# Altium PCB AICatRope V1.2双面板 1.0mm.PcbDoc
Units mil, origin at the board's own origin, x right, y up, seen from the top; angles counter-clockwise.
Board outline 6000 x 4000 mil, 2 copper layers (Top Layer, Bottom Layer); 59 components, 38 nets, 170 pads, 87 vias.
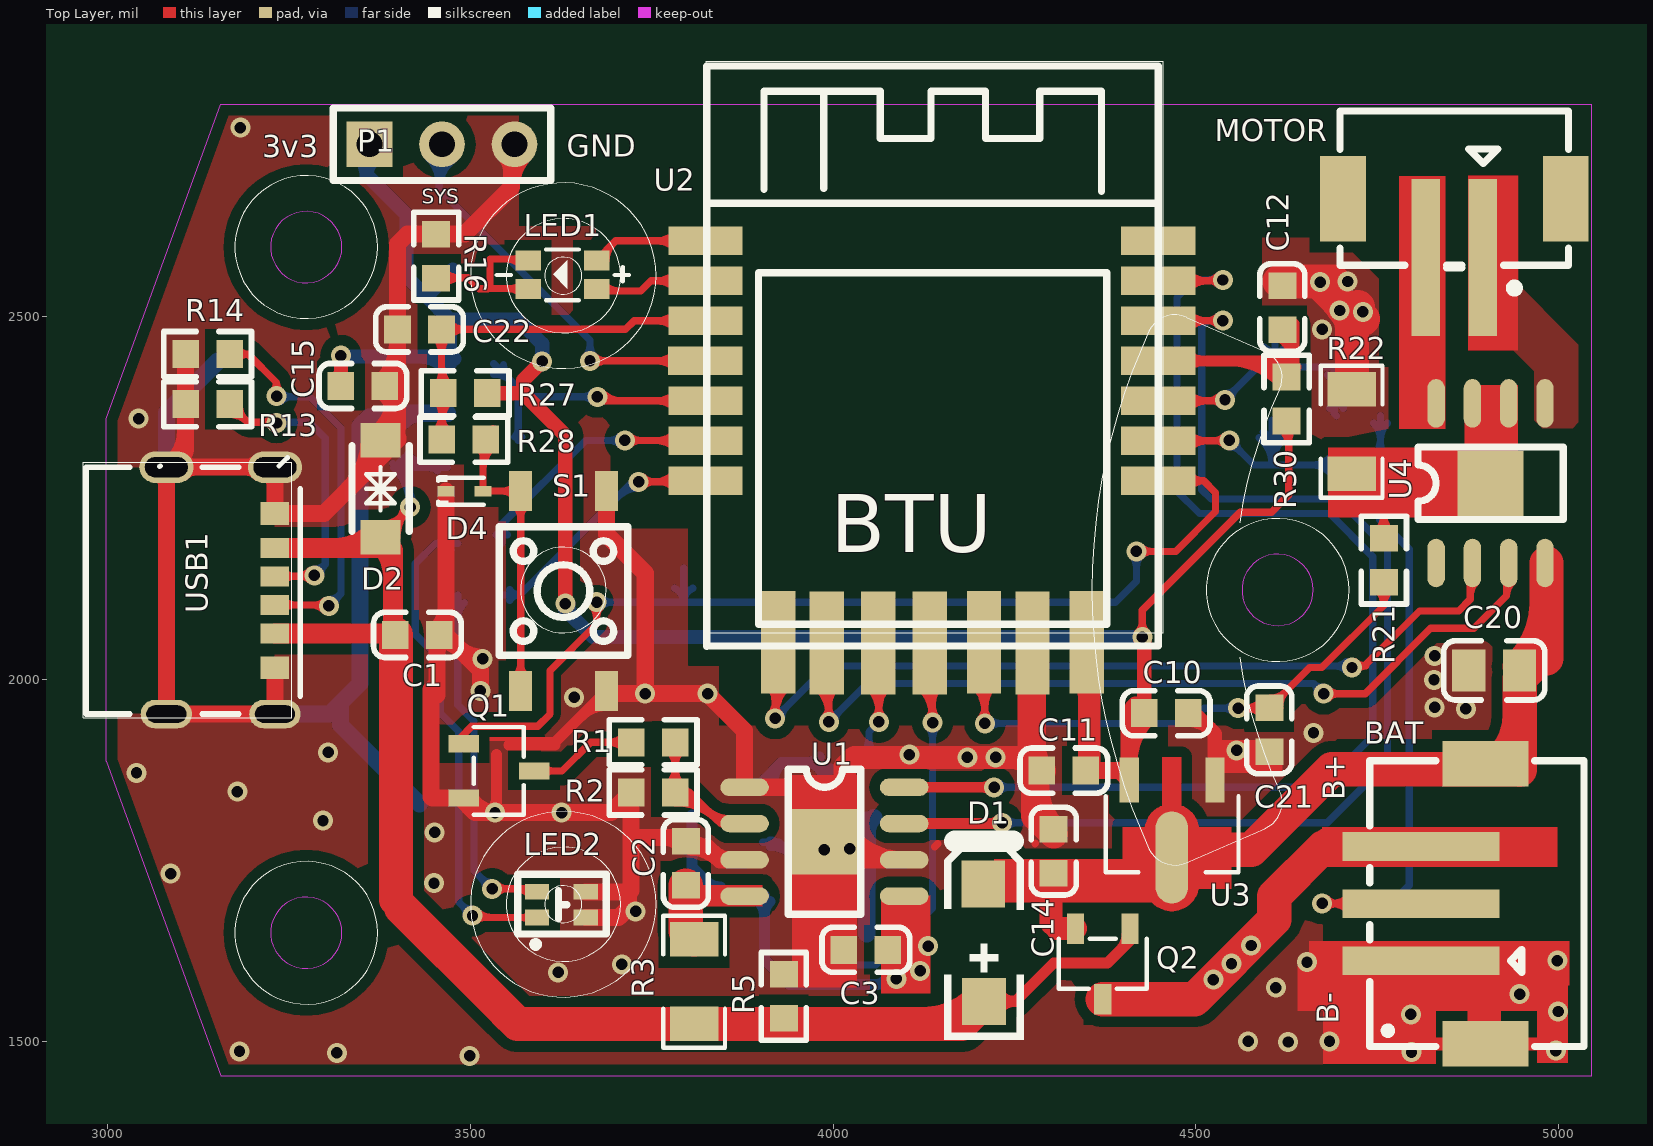
[diagram p0: Top Layer view]
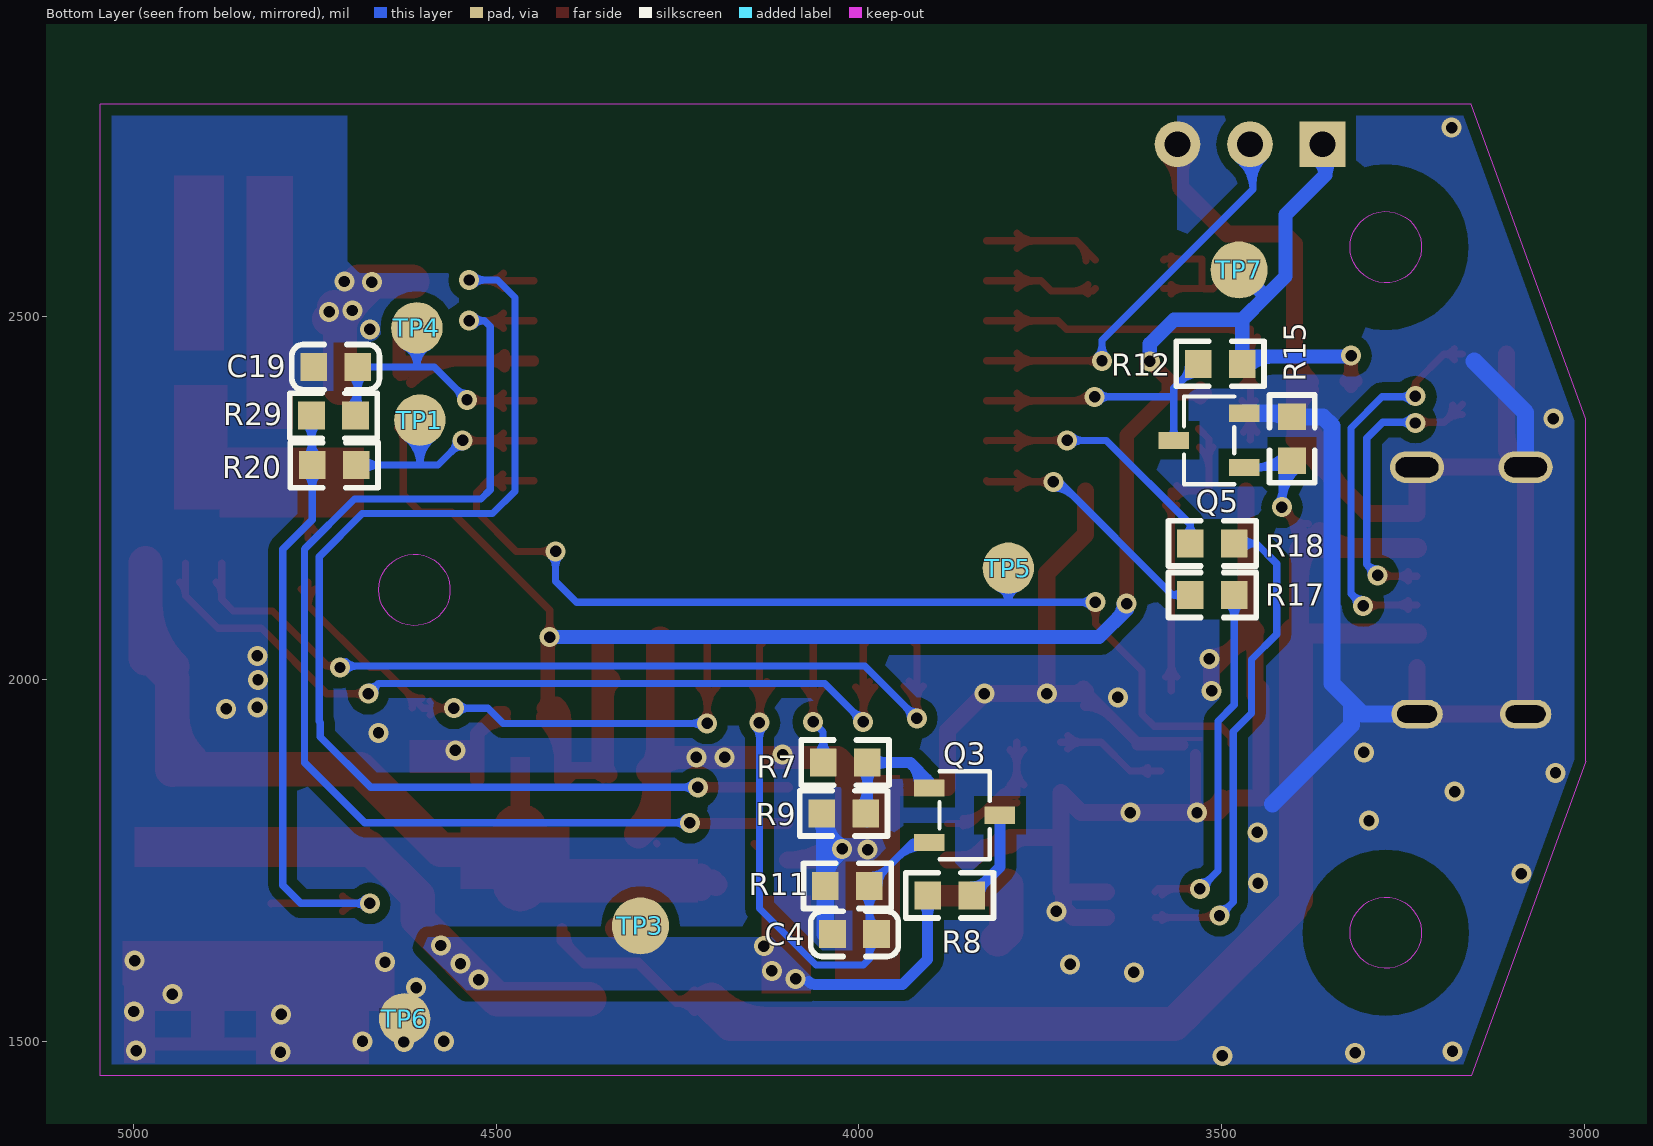
[diagram p1: Bottom Layer view, seen from below]
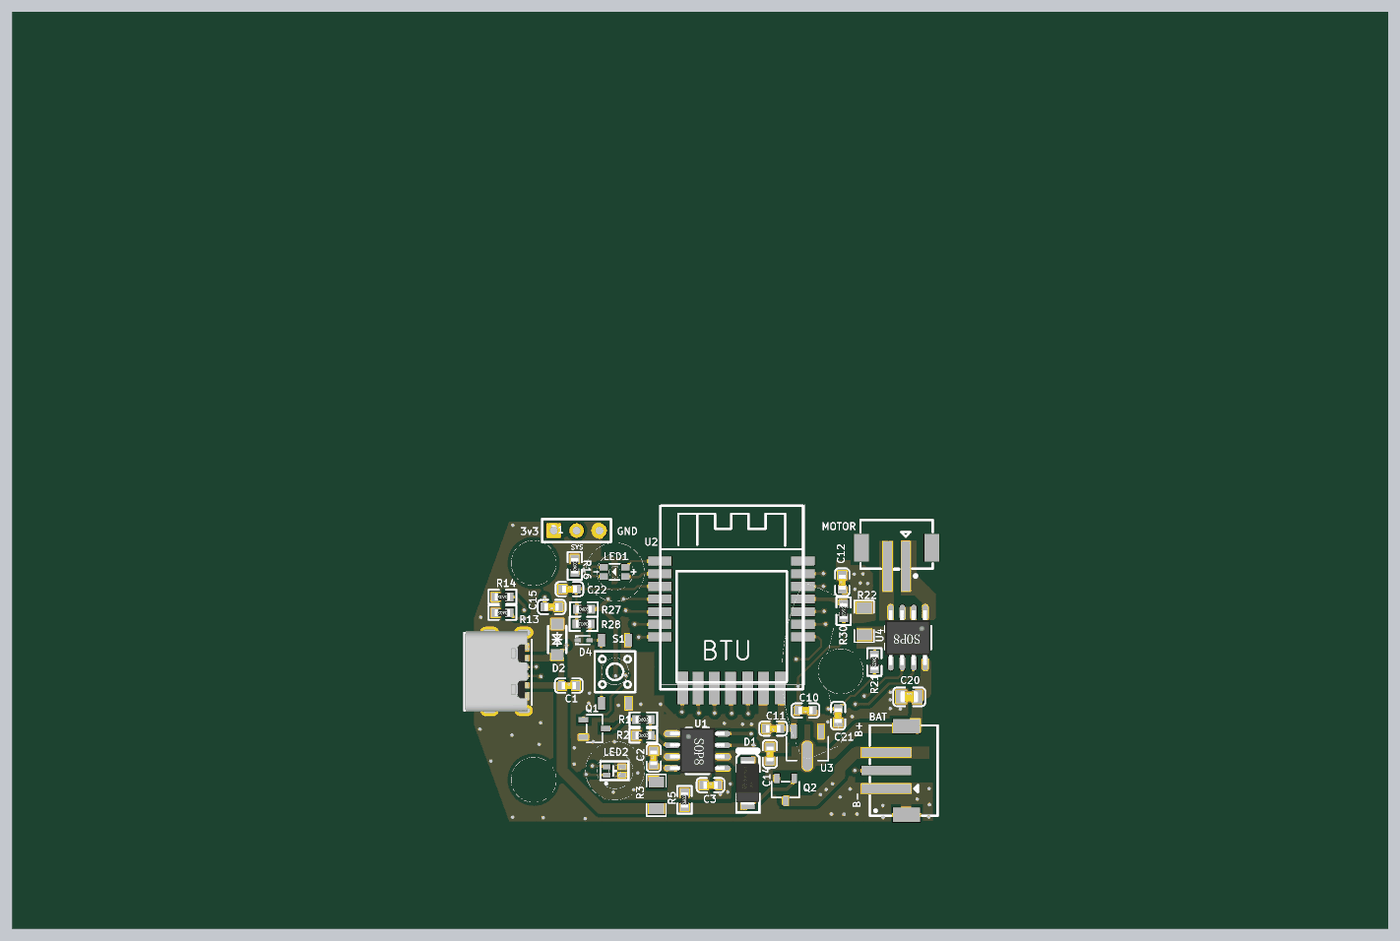
[diagram p2: 3D render of the assembled board from above, using the file's embedded part models]
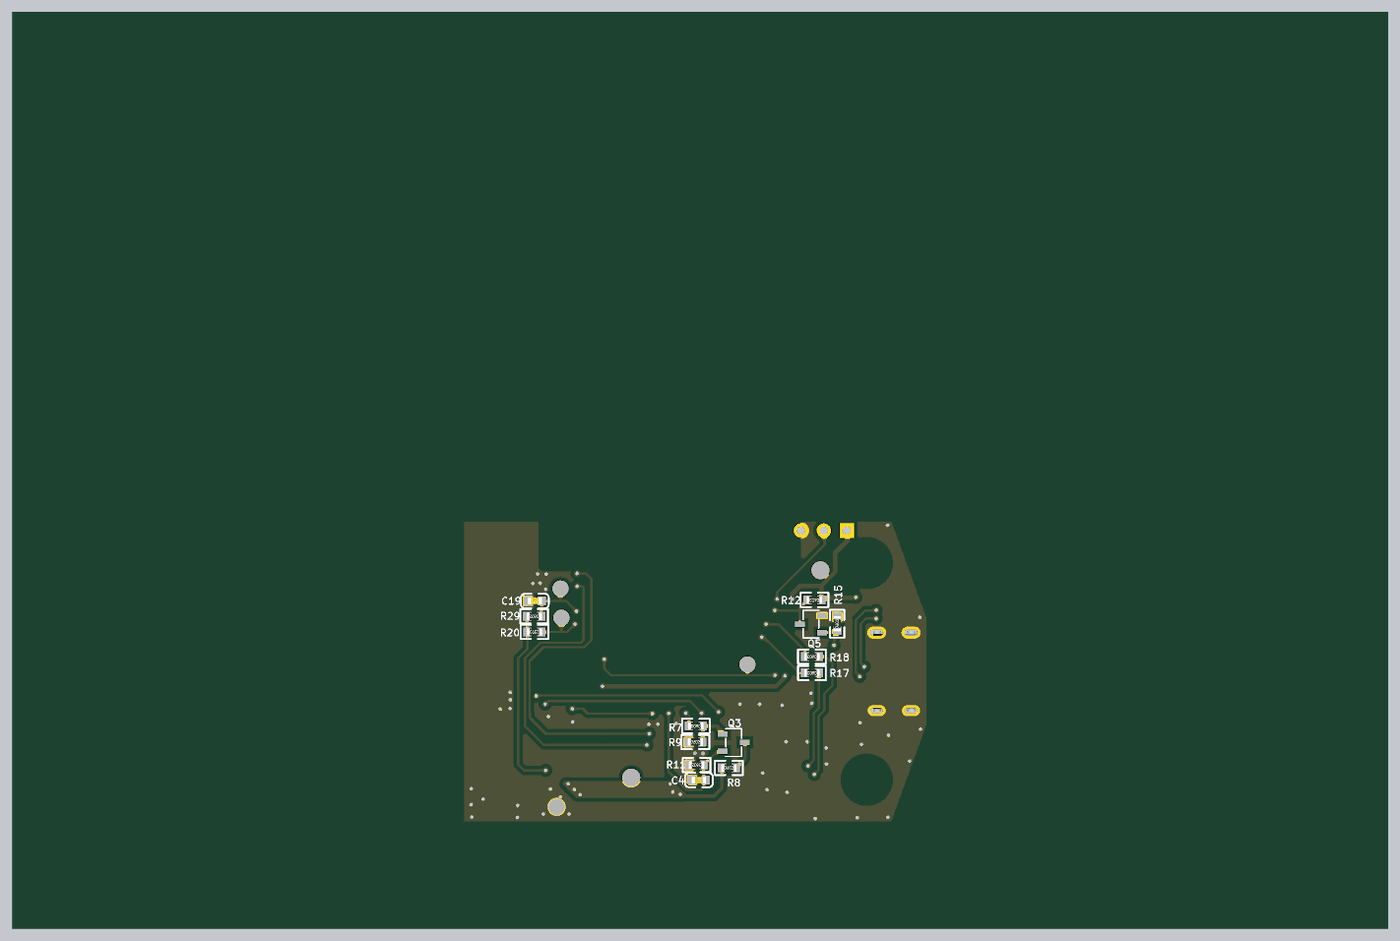
[diagram p3: 3D render of the assembled board from below, using the file's embedded part models]

## Layer stack, top to bottom
Top Layer: signal copper 1.4
Dielectric: dielectric 12.6, FR-4, Dk 4.8
Bottom Layer: signal copper 1.4

## Board outline
1000,1000 7000,1000 7000,5000 1000,5000

## Design rules (kind name [scope] priority, off if disabled: settings)
Clearance [All] p1: gap=7
ComponentClearance [All] p1: gap=0 collisioncheckmode=3 verticalgap=0 showdistances=FALSE
MinimumSolderMaskSliver [All] p1: minsoldermaskwidth=0
PolygonConnect [All] p1: connectstyle=Direct reliefconductorwidth=10 reliefentries=4 polygonreliefangle="90 Angle"
RoutingVias [All] p1: holewidth=28 width=50 viastyle="Through Hole" minholewidth=28 minwidth=50 maxholewidth=28 maxwidth=50
SilkToSilkClearance [All] p1: silktosilkclearance=0
SilkscreenOverComponentPads [All] p1: minsilkscreentomaskgap=0
SolderMaskExpansion [All] p1: expansion=4
TestPointUsage [All] p1: valid=0 allowmultiple=FALSE
Testpoint [All] p1: side=15 testpointundercomponent=TRUE minsize=40 maxsize=100 preferedsize=60 minholesize=0 maxholesize=40 preferedholesize=32 testpointgrid=1 style=1023 order=0-112345678
Width [All] p1: maxlimit=200 minlimit=10 preferedwidth=10 minimp=50.000000 maximp=50.000000 favimp=50.000000
20 further rules are at their usual default settings.

## Classes and differential pairs
component class cat: BAT C1 C2 C3 C4 C10 C11 C12 C14 C15 C19 C20 C21 C22 D1 D2 D4 LED1 LED2 MOTOR P1 Q1 Q2 Q3 Q5 R1 R2 R3 R5 R7 R8 R9 R11 R12 R13 R14 R15 R16 R17 R18 R20 R21 R22 R27 R28 R29 R30 S1 TP1 TP2 U1 U2 U3 U4 USB1

## Components (designator, comment, footprint, x,y, rotation, side; value= is the part's Value field where it differs from the comment)
BAT "BX-PH2.0-3PWT" CONN-SMD_2.0-3PLT 4860,1728 r270 top (schematic designator BAT1)
C1 "100nF" 0603_C 3427,2061 r0 top
C2 "4.7UF" 0603_c 3797,1746 r270 top
C3 "10UF" 0603_c 4045,1627 r0 top
C4 "100nF" 0603_C 4006,1649 r180 bottom
C10 "10uf/25V" 0603_c 4459,1953 r180 top
C11 "100nF" 0603_C 4318,1874 r180 top
C12 "100nF" 0603_c 4619,2512 r270 top
C14 "10uf/25V" 0603_c 4304,1763 r270 top
C15 "10uf" 0603_c 3352,2404 r180 top
C19 "100nF" 0603_C 4721,2430 r0 bottom
C20 "22uf 25V" 0805_C 4911,2012 r0 top
C21 "104" 0603_C 4601,1930 r90 top
C22 "100nF" 0603_c 3430,2482 r0 top
D1 "SS54" SMA 4211,1613 r270 top
D2 "SMF6.0CA" "SOD-123 双向" 3374,2256 r270 top
D4 "" SOD-523_L1.2-W0.8-LS1.6-RD 3492,2259 r0 top
LED1 "*" LED-SMD_4P-L3.2-W1.6-TL_XL-3216SURUGC 3627,2557 r180 top
LED2 "tj-s1615sw6tglcbg-a5" LED-ARRAY-SMD_4P-L1.6-W1.5-TR-RD_TJ-S1615SW6TGLCRB-A5 3621,1686 r180 top
MOTOR "2.0-2P WT" CONN-SMD_2.0-2PLT 4864,2646 r0 top (schematic designator CN1)
P1 "DEBUG" SIP3-2.54 3361,2737 r0 top
Q1 "2N7002" SOT-23 3519,1865 r180 top
Q2 "CJ3401" SOT-23 4363,1628 r90 top
Q3 "AO3400" SOT-23 3874.63,1804 r0 bottom
Q5 "2N7002" SOT-23 3497.06,2337.52 r180 bottom
R1 "2k" 0603_R 3752,1913 r0 top
R2 "3.9k" 0603_R 3752,1844 r0 top
R3 "R250" 1206_R 3810,1577 r270 top
R5 "10K" 0603_R 3932,1563 r270 top
R7 "100R" 0603_r 4019,1885 r0 bottom
R8 "100K" 0603_R 3875,1702 r180 bottom
R9 "10K" 0603_r 4021,1815 r180 bottom
R11 "30K" 0603_R 4016,1715 r0 bottom
R12 "10k" 0603_R 3502.06,2434.52 r0 bottom
R13 "5.1K" 0603_R 3138,2378.9 r180 top
R14 "5.1K" 0603_R 3138,2447.9 r180 top
R15 "100k" 0603_R 3403,2331 r90 bottom
R16 "1K" 0603_R 3453,2583 r270 top
R17 "1k" 0603_R 3513,2187 r0 bottom
R18 "1k" 0603_R 3513,2116 r0 bottom
R20 "10k" 0603_R 4723,2295 r180 bottom
R21 "1k" 0603_R 4759,2164 r90 top
R22 "0.62R" 1206_r 4716,2335 r270 top
R27 "10k" 0603_R 3493,2394 r0 top
R28 "100R" 0603_r 3491,2330 r180 top
R29 "1k" 0603_R 4724,2363 r0 bottom
R30 "10K" 0603_R 4625,2386 r90 top
S1 "" SW-SMD_4P-SH-4.5X4.5X4.0H-TP 3637,2126 r90 top
TP1 "" TP#1 4605,2357 r0 top
TP3 "" TP#2 4301,1660 r0 top (schematic designator TP1)
TP4 "" TP#1 4609,2484 r0 top (schematic designator TP1)
TP5 "" TP#1 3794,2153 r0 top (schematic designator TP1)
TP6 "" TP#1 4626,1532 r0 top (schematic designator TP1)
TP7 "" TP#2 3476,2564 r180 top (schematic designator TP2)
U1 "TP4056X" SOP8-9 3988,1776 r270 top
U2 "BTU" BTU 3822,1900 r0 top
U3 "HT7533-1 36V 150mA" SOT-89_L4.5-W2.5-P1.50-LS4.2-BR 4462,1777 r90 top
U4 "TC118S" SOP8-9 4906,2270 r0 top
USB1 "TYPE-C 6P" TPYE-C-6 3156,2122 r0 top

## Footprints (in the part's own frame and the unit in brackets; to place one, negate y for a bottom-side part, rotate by r counter-clockwise, add the part's x,y. Pads: shape width x height; smd on the part's side, far side on the other; paste and mask are expansions set on the pad)
0603_C [mm]
  rect 0.93x0.98 smd: 1(-0.77,0) 2(0.77,0)
  silkscreen extent -1.54,-0.79 1.54,0.79, body extent -0.8,-0.4 0.8,0.4, height 0.3
0603_c [mm]
  rect 0.93x0.98 smd: 1(-0.77,0) 2(0.77,0)
  silkscreen extent -1.54,-0.79 1.54,0.79, body extent -0.8,-0.4 0.8,0.4, height 0.3
0603_R [mm]
  rect 0.93x0.98 smd: 1(-0.77,0) 2(0.77,0)
  silkscreen extent -1.53,-0.79 1.54,0.79, body extent -0.85,-0.4 0.85,0.4, height 0.56
0603_r [mm]
  rect 0.93x0.98 smd: 1(-0.77,0) 2(0.77,0)
  silkscreen extent -1.53,-0.79 1.54,0.79, body extent -0.85,-0.4 0.85,0.4, height 0.56
0805_C [mm]
  rect 1.16x1.47 smd: 1(-0.89,0) 2(0.89,0)
  silkscreen extent -1.77,-1.04 1.77,1.04, body extent -1,-0.62 1,0.63, height 0.77
1206_R [mil]
  rect 47.54x66.97 smd: 1(-64.23,-1.52) 2(52.21,-1.52)
  silkscreen extent -97,-44 85,41
1206_r [mil]
  rect 47.54x66.97 smd: 1(-64.23,-1.52) 2(52.21,-1.52)
  silkscreen extent -97,-44 85,41
BTU [mm]
  rect 2.6x1 smd paste+0 mask+0.102: 1(0.051,17.882) 2(0.051,16.482) 3(0.051,15.082) 4(0.049,13.68) 5(0.051,12.282) 6(0.051,10.882) 7(0.051,9.482) 15(15.9,9.48) 16(15.9,10.88) 17(15.9,12.28) 18(15.9,13.68) 19(15.9,15.08) 20(15.9,16.48) 21(15.9,17.88)
  rect 1.2x3.6 smd paste+0 mask+0.102: 8(2.602,3.834) 9(4.3,3.8) 10(6.1,3.8) 11(7.9,3.8) 12(9.802,3.834) 13(11.5,3.8) 14(13.402,3.834)
  silkscreen extent 0.1,3.68 15.9,24
CONN-SMD_2.0-2PLT [mm]
  rect 1x5.5 smd: 1(0.798,-1.644) 2(-1.202,-1.644)
  rect 1.6x3 smd: 3(3.698,0.406) 4(-4.102,0.406)
  silkscreen extent -4.2,-2.87 3.8,3.48
CONN-SMD_2.0-3PLT [mm]
  rect 1x5.5 smd: 1(2.95,-1.263) 2(0.95,-1.263) 3(-1.05,-1.263)
  rect 1.6x3 smd: 4(-3.95,0.987) 5(5.85,0.987)
  silkscreen extent -4.05,-3.06 5.95,4.44
LED-ARRAY-SMD_4P-L1.6-W1.5-TR-RD_TJ-S1615SW6TGLCRB-A5 [mil]
  rect 33.5x21.7 smd: 1(29.04,14.6) 2(-37.96,14.6) 3(29.04,-20.9) 4(-37.96,-20.9)
  silkscreen extent -66,-45 56,55
LED-SMD_4P-L3.2-W1.6-TL_XL-3216SURUGC [mm]
  rect 0.9x0.7 smd: 1(-1.2,0.5) 2(1.2,0.5) 3(-1.2,-0.5) 4(1.2,-0.5)
  silkscreen extent -2.33,-0.89 2.3,0.89
SIP3-2.54 [mm]
  rect 1.6x1.6 hole 0.9: 1(0,0)
  round 1.6 hole 0.9: 2(2.54,0) 3(5.08,0)
  silkscreen extent -1.27,-1.27 6.35,1.27
SMA [mm]
  rect 1.65x1.53 smd: 1(1.449,-0.076) 2(-2.665,-0.102)
  silkscreen extent -4.16,-1.47 2.8,1.32, body extent -3.06,-1.39 1.84,1.18, height 2.39
"SOD-123 双向" [mm]
  rect 1.2x1.4 smd: 1(-1.864,0.06) 2(1.536,0.06)
  silkscreen extent -1.66,-0.94 1.34,1.06
SOD-523_L1.2-W0.8-LS1.6-RD [mm]
  rect 0.6x0.36 smd paste+0.051 mask+0: 1(-0.65,0) 2(0.65,0)
  silkscreen extent -0.91,-0.55 0.68,0.55
SOP8-9 [mil]
  oval 24x66.93 smd: 1(-75,-110) 2(-25,-110) 3(25,-110) 4(75,-110) 5(75,110) 6(25,110) 7(-25,110) 8(-75,110)
  rect 90.55x90.55 smd: 9(0,0)
  silkscreen extent -100,-50 100,50, body extent -100,-119 98,119, height 63
SOT-23 [mm]
  rect 1.07x0.6 smd: 1(0.719,-1.166) 2(0.719,0.734) 3(-1.751,-0.216)
  silkscreen extent -1.39,-1.75 0.36,1.32
SOT-89_L4.5-W2.5-P1.50-LS4.2-BR [mm]
  rect 1.575x0.672 smd: 1(2.135,-1.63) 3(2.135,1.37)
  oval 3.226x1.14 smd: 2(-0.577,-0.121)
  Top Layer region: -1.504,0.829 0.35,0.829 0.394,0.828 0.439,0.825 0.483,0.819 0.527,0.812 0.571,0.803 0.614,0.792 0.656,0.778 0.698,0.763 0.739,0.746 0.779,0.726 0.818,0.705 0.857,0.682 0.894,0.658 0.93,0.631 0.964,0.603 0.998,0.574 1.03,0.543 1.06,0.51 1.089,0.476 1.116,0.441 1.141,0.404 1.165,0.367 1.187,0.328 1.207,0.288 1.225,0.209 2.923,0.209 2.923,-0.451 1.225,-0.451 1.207,-0.53 1.187,-0.57 1.165,-0.609 1.141,-0.647 1.116,-0.683 1.089,-0.718 1.06,-0.752 1.03,-0.785 0.998,-0.816 0.964,-0.846 0.93,-0.874 0.894,-0.9 0.857,-0.925 0.818,-0.948 0.779,-0.969 0.739,-0.988 0.698,-1.005 0.656,-1.02 0.614,-1.034 0.571,-1.045 0.527,-1.054 0.483,-1.062 0.439,-1.067 0.394,-1.07 0.35,-1.071 -1.504,-1.071 -1.549,-1.07 -1.593,-1.067 -1.637,-1.062 -1.681,-1.054 -1.725,-1.045 -1.768,-1.034 -1.811,-1.02 -1.852,-1.005 -1.893,-0.988 -1.934,-0.969 -1.973,-0.948 -2.011,-0.925 -2.048,-0.9 -2.084,-0.874 -2.119,-0.846 -2.152,-0.816 -2.184,-0.785 -2.214,-0.752 -2.243,-0.718 -2.27,-0.683 -2.296,-0.647 -2.319,-0.609 -2.341,-0.57 -2.362,-0.53 -2.38,-0.49 -2.396,-0.448 -2.41,-0.406 -2.423,-0.363 -2.433,-0.32 -2.442,-0.276 -2.448,-0.232 -2.452,-0.188 -2.454,-0.143 -2.454,-0.099 -2.452,-0.054 -2.448,-0.01 -2.442,0.034 -2.433,0.078 -2.423,0.121 -2.41,0.164 -2.396,0.206 -2.38,0.248 -2.362,0.288 -2.341,0.328 -2.319,0.367 -2.296,0.404 -2.27,0.441 -2.243,0.476 -2.214,0.51 -2.184,0.543 -2.152,0.574 -2.119,0.603 -2.084,0.631 -2.048,0.658 -2.011,0.682 -1.973,0.705 -1.934,0.726 -1.893,0.746 -1.852,0.763 -1.811,0.778 -1.768,0.792 -1.725,0.803 -1.681,0.812 -1.637,0.819 -1.593,0.825 -1.549,0.828
  silkscreen extent -1.09,-2.46 1.56,2.2
SW-SMD_4P-SH-4.5X4.5X4.0H-TP [mil]
  rect 55.1x31.5 smd: 1(-142.4,67.6) 2(133.1,67.6) 3(-142.4,-50.5) 4(133.1,-50.5)
  silkscreen extent -93,-80 84,97
TP#1 [mm]
  round 1.8 smd far side: 1(0,0)
TP#2 [mm]
  round 2 smd far side: 1(0,0)
TPYE-C-6 [mm]
  oval 1.9x1.1 hole 0.7 slot 1.5 at 0 deg: 7(-1.9,4.32) 7(1.9,4.32)
  oval 1.8x1 hole 0.6 slot 1.4 at 0 deg: 7(-1.9,-4.32) 7(1.9,-4.32)
  rect 1x0.7 smd: A5(1.9,0.5) A9(1.9,-1.5) B5(1.9,-0.5) B9(1.9,1.5)
  rect 1x0.8 smd: A12(1.9,-2.7) B12(1.9,2.7)
  silkscreen extent -4.7,-4.32 2.79,4.65, body extent -4.55,-4.45 2.25,4.49, height 3.41

## Part data
C1 C2 C3 C4 C11 C19: library part CAP
C10 C14: library part Cap1, "无极电容"
C12 C21: library part CAP, "Capacitor"
C15 C20: library part C-0603, "C-?-K-0603"
C22: library part CAP_0603
D1: library part "Diode 1N4148", "High Conductance Fast Diode"
D2: library part SMF5.0CA_C726939
D4: library part LESD5Z5.0CT1G
LED1: library part TJ-S2012SW8TCGLC2R2G-A5
P1: library part "Header 4", "Header, 4-Pin"
Q1: library part AO3400_SOT23
Q3 Q5: library part JMTL3400A
R1 R2 R3 R8 R11 R12 R13 R14 R15 R16 R17 R18 R27 R30: library part RES
R5 R7 R9 R20 R21 R22 R29: library part Res2, "Resistor"
R28: library part Res_0603
S1: library part TS-1002S-05026C
TP1 TP3 TP4 TP5 TP6 TP7: library part "T POINT R"
U1: library part TP4056, "TP4056"
U3: library part HT7533-1_C347186

## Via types
v1: diameter 27.56, hole 15.75, Top Layer to Bottom Layer, tented both sides, 87 vias

## Nets (pads, with @x,y where several pads share a name; then routed paths per layer and width w, separated by ;. In a path a pad name is that pad's centre, name@x,y a point inside that pad or via, vN(x,y) a via of type N, cw(c..) or ccw(c..) an arc to the next point about the centre after c; other vN are vias at no path point)
3V3: C10.2 C11.1 C15.2 P1.1 R12.1 R27.2 R30.1 TP7.1 U2.14 U3.3 | length 3374.5
  Top Layer w10: v1(3321.69,2445.69) 3321.69,2449.69 v1@3322,2450 ; C11.1@4344.75,1868.57 C11.1@4352.25,1861.06 ; v1@4419.79,2064.21 ccw(c4404.8,2079.2) 4426,2079.2 ccw(c4447.2,2079.2) v1@4432.21,2064.21 ; v1(4426,2058) 4426,2095 4561,2230 4604,2230 4628,2254 4628,2352.69 R30.1 ; C10.2@4427,1954.69 C10.2 ; R30.1@4616.57,2346.28 cw(c4588.99,2318.69) 4628,2318.69 ; 4628,2328.43 cw(c4653.24,2328.43) R30.1@4635.39,2346.28
  Top Layer w19.68: C15.2@3315.7,2410.97 ccw(c3301.25,2425.42) 3321.69,2425.42 ccw(c3342.12,2425.42) C15.2@3327.67,2410.97 ; C15.2 v1(3321.69,2445.69) ; R27.2 3573,2394 ; R27.2@3529.3,2388.01 cw(c3543.75,2373.56) 3543.75,2394 cw(c3543.75,2414.44) R27.2@3529.3,2399.99 ; v1(3599,2438) 3573,2412 3573,2394 ; v1(3631,2104) 3631,2336 3573,2394 ; C10.2@4422.7,1959.97 ccw(c4408.25,1974.42) 4428.69,1974.42 ccw(c4449.12,1974.42) C10.2@4434.67,1959.97 ; v1@4423.22,2055.22 cw(c4410.01,2042.01) 4428.69,2042.01 ; C10.2 v1@4428.69,2055.31
  Top Layer w23.62: C11.1@4344.75,1868.57 4347,1874 4395.12,1874 U3.3 4408.06,1932.37 C10.2 ; 4392.95,1874 ccw(c4392.95,1893.94) U3.3@4407.05,1879.84 ; U3.3@4408.06,1886.53 cw(c4494.17,1886.53) C10.2@4433.28,1947.42 ; 4408.06,1923.53 cw(c4430.08,1923.53) C10.2@4429,1945.53 ; 4408.06,1943.56 cw(c4437.15,1943.56) C10.2@4416.58,1964.13
  Top Layer w31.5: U2.14@4344.05,1998.13 cw(c4322.46,1976.53) 4353,1976.53 ; C11.1@4353,1874 U2.14@4353,2049.24
  Bottom Layer w19.68: v1@3321.69,2444.69 3461.58,2444.69 R12.1 3471.75,2495.25 ; P1.1@3345.8,2721.58 cw(c3319.42,2694.81) 3357,2694.81 cw(c3382.86,2694.81) P1.1@3370.96,2717.77 ; P1.1@3357,2732 3357,2695 3412,2640 3412,2555 3439,2528 ; 3429.15,2444.69 cw(c3429.15,2392.9) R12.1@3465.76,2429.52 ; R12.1@3465.76,2441.49 ccw(c3451.31,2455.94) 3471.75,2455.94 ccw(c3492.18,2455.94) R12.1@3477.73,2441.49 ; TP7.1 3440,2528 3439,2528 ; v1(3599,2438) 3599,2462 3565.75,2495.25 3471.75,2495.25 ; v1@3631,2096 3669,2058 v1(4426,2058) ; v1@3634.94,2104 ccw(c3663.76,2104) 3643.38,2083.62 ; 3439,2528 3471.75,2495.25
AD_BAT: C4.2 Q3.2 R11.1 U2.11 | length 1135.9
  Top Layer w10: U2.11@4119.86,1989.19 cw(c4078.47,1947.8) v1@4137,1947.8 ; U2.11@4126.93,1996.27 cw(c4102.61,1971.95) 4137,1971.95 ; v1@4130.79,1946.21 ccw(c4115.8,1961.2) 4137,1961.2 ccw(c4158.2,1961.2) v1@4143.21,1946.21 ; U2.11 4137,2045.63 v1(4137,1940) ; 4137,1967.01 cw(c4168.38,1967.01) U2.11@4146.19,1989.19
  Bottom Layer w10: Q3.2 3925.57,1775.12 R11.1 3985.69,1649 3985.69,1614.31 3994,1606 4041,1606 4059.02,1606 4137,1683.98 v1(4137,1940) ; Q3.2@3912.19,1768.31 cw(c3912.19,1719.56) 3946.66,1754.03 ; Q3.2@3912.19,1778.31 cw(c3912.19,1753.71) 3929.58,1771.1 ; 3961.29,1739.4 ccw(c3985.69,1763.79) R11.1@3985.69,1729.29 ; 3963.67,1737.02 cw(c3942.63,1715.98) R11.1@3972.38,1715.98 ; C4.2@3976.28,1638.61 cw(c3953.56,1615.89) 3985.69,1615.89 ; C4.2@3976.28,1659.39 ccw(c3953.56,1682.11) 3985.69,1682.11 ; R11.1@3976.28,1704.61 cw(c3953.56,1681.89) 3985.69,1681.89 cw(c4017.81,1681.89) R11.1@3995.1,1704.61 ; v1@4130.79,1933.79 cw(c4115.8,1918.8) 4137,1918.8 cw(c4158.2,1918.8) v1@4143.21,1933.79
AD_BAT_CON: R7.2 U2.10 | length 325
  Top Layer w10: U2.10@4048.99,1989.19 cw(c4015.17,1955.37) 4063,1955.37 ; v1@4056.79,1947.21 ccw(c4041.8,1962.2) 4063,1962.2 ccw(c4084.2,1962.2) v1@4069.21,1947.21 ; U2.10 4063,2048.76 v1(4063,1941) ; 4063,1959.44 cw(c4105.08,1959.44) U2.10@4075.33,1989.19
  Bottom Layer w10: R7.2@4039.91,1895.39 ccw(c4017.19,1918.11) 4049.32,1918.11 ccw(c4081.44,1918.11) R7.2@4058.73,1895.39 ; R7.2 4049.32,1927.32 v1(4063,1941)
AD_MOTOR: C21.2 R21.1 U2.12 | length 1117
  Top Layer w10: U2.12@4194.72,1990.53 cw(c4160.25,1956.05) 4209,1956.05 ; v1@4202.79,1945.21 ccw(c4187.8,1960.2) 4209,1960.2 ccw(c4230.2,1960.2) v1@4215.21,1945.21 ; U2.12 4209,2049.83 v1(4209,1939) ; 4209,1961.42 cw(c4250.17,1961.42) U2.12@4221.06,1990.53 ; v1(4558,1960) 4600.69,1960 C21.2 4656.69,2016 4673.41,2016 4759,2101.59 ; v1@4564.21,1953.79 cw(c4579.2,1938.8) 4579.2,1960 cw(c4579.2,1981.2) v1@4564.21,1966.21 ; v1@4567.13,1960 ccw(c4567.13,1993.2) C21.2@4590.61,1969.72 ; v1@4568.65,1960 cw(c4568.65,1928.95) C21.2@4590.61,1950.9 ; C21.2@4601.98,1973.62 ccw(c4601.98,2003.37) 4623.02,1982.33 ; C21.2@4615.29,1960.31 cw(c4649.79,1960.31) 4625.4,1984.71 ; R21.1@4749.6,2124.27 cw(c4726.95,2101.59) 4759,2101.59 ; R21.1 4759,2101.59 ; R21.1@4768.4,2124.27 ccw(c4791.05,2101.59) 4759,2101.59
  Bottom Layer w10: v1(4209,1939) 4490,1939 4511,1960 v1(4558,1960) ; v1@4215.21,1932.79 cw(c4230.2,1917.8) 4230.2,1939 cw(c4230.2,1960.2) v1@4215.21,1945.21 ; v1@4551.79,1953.79 ccw(c4536.8,1938.8) 4536.8,1960 ccw(c4536.8,1981.2) v1@4551.79,1966.21
AD_NTC: C19.1 R29.1 TP4.1 U2.17 | length 684
  Top Layer w10: U2.17 v1@4540,2383.46 ; U2.17@4489.86,2373.08 cw(c4514.93,2348.01) 4514.93,2383.46 cw(c4514.93,2418.92) U2.17@4489.86,2393.85 ; 4515.1,2383.46 ccw(c4515.1,2409.9) v1@4533.79,2391.21 ; 4522.51,2383.46 cw(c4522.51,2367.51) v1@4533.79,2378.79
  Bottom Layer w10: v1(4540,2385) 4585,2430 4607,2430 ; v1@4540,2393.78 ccw(c4540,2414.98) 4554.99,2399.99 ccw(c4569.98,2385) v1@4548.78,2385 ; TP4.1@4594.1,2457.47 cw(c4579.8,2432) 4609,2432 ; TP4.1 4609,2432 ; TP4.1@4623.9,2457.47 ccw(c4638.2,2432) 4609,2432 ; 4661.68,2430 4650,2430 ; C19.1@4681.27,2419.61 cw(c4658.56,2396.89) 4690.68,2396.89 cw(c4722.81,2396.89) C19.1@4700.09,2419.61 ; R29.1@4684.28,2373.39 ccw(c4668.81,2388.86) 4690.68,2388.86 ; 4690.68,2403.36 ccw(c4733.06,2403.36) R29.1@4703.1,2373.39 ; R29.1@4691.69,2365 R29.1 4690.68,2366 C19.1 4650,2430 ; 4607,2430 4650,2430 ; 4607,2430 4609,2432
AD_NTC_CON: R20.2 TP1.1 U2.16 | length 644.5
  Top Layer w10: U2.16 v1@4546,2328.35 ; U2.16@4489.86,2317.96 cw(c4514.93,2292.89) 4514.93,2328.35 cw(c4514.93,2363.8) U2.16@4489.86,2338.73 ; 4523.23,2328.35 ccw(c4523.23,2351.77) v1@4539.79,2335.21 ; 4526.38,2328.35 cw(c4526.38,2309.38) v1@4539.79,2322.79
  Bottom Layer w10: v1@4546,2320.22 cw(c4546,2299.02) 4560.99,2314.01 cw(c4575.98,2329) v1@4554.78,2329 ; v1(4546,2329) 4580,2295 R20.2 R20.2@4685.68,2302 ; TP1.1@4586.7,2332.69 cw(c4559.09,2296) 4605,2296 ; TP1.1@4592.71,2340.67 cw(c4574.17,2316.05) 4605,2316.05 cw(c4635.83,2316.05) TP1.1@4617.29,2340.67 ; TP1.1 4605,2296 ; TP1.1@4623.3,2332.69 ccw(c4650.91,2296) 4605,2296 ; R20.2@4683.27,2285.59 ccw(c4660.56,2262.87) 4660.56,2295 ccw(c4660.56,2327.13) R20.2@4683.27,2304.41
BAT+: BAT.3 C3.2 Q2.3 R8.1 TP3.1 U1.5 | length 860
  Top Layer w47.24: Q2.3 4409,1559.06 4448,1559.06 4498.06,1559.06 4607.82,1668.82 4607.82,1700.82 4675,1768 ; 4683,1772 BAT.3@4814.09,1772
  Bottom Layer w15: R8.1@3897.67,1693.37 cw(c3879.22,1674.93) 3905.31,1674.93 cw(c3931.4,1674.93) R8.1@3912.96,1693.37 ; R8.1 3905.31,1613.69 3940,1579 4058,1579 ; 4058.84,1579 ccw(c4058.84,1594.16) 4069.56,1583.44 cw(c4058.84,1594.16) 4058.84,1579
  other v1: 4524,1586 4087,1587 4120,1598 4549,1608 4131,1632 4576,1633
CC1: R13.1 USB1.A5 | length 616.1
  Top Layer w10: R13.1@3168.31,2364.61 cw(c3168.31,2330.1) 3192.71,2354.5 ; R13.1 3193.21,2354 v1@3233,2354 ; R13.1@3181.62,2377.91 ccw(c3211.37,2377.91) 3190.33,2356.88 ; v1@3226.79,2347.79 ccw(c3211.8,2332.8) 3211.8,2354 ccw(c3211.8,2375.2) v1@3226.79,2360.21 ; USB1.A5 v1@3283.69,2141.69 ; USB1.A5@3242.91,2135.48 cw(c3257.9,2120.49) 3257.9,2141.69 cw(c3257.9,2162.89) USB1.A5@3242.91,2147.9 ; 3260.64,2141.69 ccw(c3260.64,2167.36) v1@3278.79,2149.21 ; 3266.97,2141.69 cw(c3266.97,2124.97) v1@3278.79,2136.79
  Bottom Layer w10: v1@3233,2354 3278,2354 3299.99,2332.01 3299.99,2157.99 ; v1@3239.21,2347.79 cw(c3254.2,2332.8) 3254.2,2354 cw(c3254.2,2375.2) v1@3239.21,2360.21 ; v1(3285,2143) 3299.99,2157.99 ; v1@3285,2151.78 ccw(c3285,2172.98) 3299.99,2157.99 ; v1@3293.78,2143 cw(c3314.98,2143) 3299.99,2157.99
  other v1: 3233,2353
CC2: R14.1 USB1.B5 | length 732.2
  Top Layer w10: R14.1 3194,2447.9 ; R14.1@3179.18,2440.22 cw(c3194,2429.76) 3194,2447.9 ; R14.1@3179.18,2455.57 ccw(c3194,2466.03) 3194,2447.9 ; v1@3227.08,2395.49 ccw(c3214.84,2408.9) 3233,2408.9 ; USB1.B5 3303.68,2102.32 v1(3305,2101) ; v1@3233,2389 3233,2408.9 ; v1@3238.92,2395.49 cw(c3251.16,2408.9) 3233,2408.9 ; USB1.B5@3242.91,2096.11 cw(c3257.9,2081.12) 3257.9,2102.32 cw(c3257.9,2123.52) USB1.B5@3242.91,2108.53 ; 3280.62,2102.32 cw(c3280.62,2076.62) v1@3298.79,2094.79 ; 3286.99,2102.32 ccw(c3286.99,2119.01) v1@3298.79,2107.21 ; 3194,2447.9 3233,2408.9
  Bottom Layer w10: v1@3233,2389 3279,2389 3321.8,2346.2 3321.8,2117.8 v1(3305,2101) ; v1@3239.21,2382.79 cw(c3254.2,2367.8) 3254.2,2389 cw(c3254.2,2410.2) v1@3239.21,2395.21 ; v1@3305,2109.78 ccw(c3305,2130.98) 3319.99,2115.99 ccw(c3334.98,2101) v1@3313.78,2101
  other v1: 3233,2390
CHAR_G: LED1.3 U2.1 | length 242.4
  Top Layer w10: LED1.3@3674.24,2577.68 3700.55,2604 U2.1 ; LED1.3@3686.96,2576.68 cw(c3720.07,2576.68) 3696.66,2600.1 ; U2.1@3782.12,2593.62 ccw(c3757.05,2568.55) 3757.05,2604 ccw(c3757.05,2639.45) U2.1@3782.12,2614.38
CHG: U1.7 U2.19 | length 1843.5
  Top Layer w10: U2.19 4536.7,2493.7 v1(4537,2494) ; U2.19@4489.86,2483.32 cw(c4514.93,2458.25) 4514.93,2493.7 cw(c4514.93,2529.15) U2.19@4489.86,2504.08 ; 4515.08,2493.7 ccw(c4515.08,2515.92) v1@4530.79,2500.21 ; 4516.53,2493.7 cw(c4516.53,2473.53) v1@4530.79,2487.79
  Top Layer w15: U1.7 v1@4232,1801 ; 4215.43,1801 ccw(c4215.43,1819.57) v1@4228.56,1806.44
  Bottom Layer w10: v1(4233,1802) 4681,1802 4763.78,1884.78 4763.78,1976 ; v1@4239.21,1795.79 cw(c4254.2,1780.8) 4254.2,1802 cw(c4254.2,1823.2) v1@4239.21,1808.21 ; v1@4530.75,2487.83 ccw(c4516,2473.28) 4516,2494 ; v1@4530.75,2500.17 cw(c4516,2514.72) 4516,2494 ; v1(4537,2494) 4516,2494 ; 4763.78,1932 4763.78,1976 ; 4516,2494 4508,2486 4508,2261 4520.83,2248.17 4695.12,2248.17 4763.78,2179.5 4763.78,1976
CHG_EN: U1.8 U2.20 | length 1838
  Top Layer w10: U2.20 4535.82,2548.82 v1(4537,2550) ; U2.20@4489.86,2538.44 cw(c4514.93,2513.37) 4514.93,2548.82 cw(c4514.93,2584.27) U2.20@4489.86,2559.2 ; 4512.95,2548.82 ccw(c4512.95,2574.05) v1@4530.79,2556.21 ; 4518.66,2548.82 cw(c4518.66,2531.66) v1@4530.79,2543.79
  Top Layer w15: U1.8 v1(4222,1851) ; v1@4217.56,1846.56 ccw(c4206.84,1835.84) 4206.84,1851 ccw(c4206.84,1866.16) v1@4217.56,1855.44
  Bottom Layer w10: v1(4222,1851) 4672.83,1851 4742.2,1920.37 4742.2,1940.28 4743.78,1941.86 4743.78,2168.76 4684.37,2228.17 4504.83,2228.17 4474,2259 4474,2526 4498,2550 v1(4537,2550) ; v1@4228.21,1844.79 cw(c4243.2,1829.8) 4243.2,1851 cw(c4243.2,1872.2) v1@4228.21,1857.21 ; v1@4530.79,2543.79 ccw(c4515.8,2528.8) 4515.8,2550 ccw(c4515.8,2571.2) v1@4530.79,2556.21
CHRG_R: LED1.1 U2.2 | length 245.9
  Top Layer w10: LED1.1@3674.24,2538.32 3677.55,2535 3735,2535 3748.88,2548.88 U2.2 ; LED1.1@3684.39,2531.11 cw(c3693.78,2521.71) 3693.78,2535 ; LED1.1@3684.39,2543.52 ccw(c3704.96,2564.1) 3704.96,2535 ; U2.2@3782.12,2538.5 ccw(c3757.05,2513.43) 3757.05,2548.88 ccw(c3757.05,2584.33) U2.2@3782.12,2559.27
GND: BAT.1 BAT.5 C1.2 C2.1 C3.1 C4.1 C10.1 C11.2 C12.1 C14.1 C15.1 C19.2 C20.1 C21.1 C22.1 D2.1 D4.1 LED2.2 LED2.4 P1.3 Q1.2 Q5.2 R2.1 R5.1 R9.1 R11.2 R13.2 R14.2 R15.2 R16.1 R22.1 S1.3 S1.4 TP6.1 U1.1 U1.3 U1.6 U1.9 U2.13 U3.1 USB1.7 USB1.A12 USB1.B12 | length 7935.2
  Top Layer w10: 4140,1769 4144.22,1773.22 ; 4278.22,1773.22 4279,1774
  Top Layer w15: v1@3529.56,1820.44 ccw(c3514.01,1835.99) 3536,1835.99 ; v1(3534,1816) 3536,1818 3536,1896 ; 3553,1909 3616.9,1909 ; 3616.9,1913 S1.3 ; 3653.27,1949.37 cw(c3687.5,1915.14) S1.3@3687.5,1963.55
  Top Layer w20: C10.1@4489.32,1943.71 cw(c4489.32,1900.31) 4520,1931 ; C10.1 4498,1953 4526.17,1924.83 U3.1
  Top Layer w23.62: USB1.7@3074.23,2285.13 cw(c3057.4,2268.3) 3081.2,2268.3 ; 3081.2,2268.35 cw(c3104.93,2268.35) USB1.7@3088.15,2285.13 ; USB1.7@3089.98,2299.05 ccw(c3047.23,2341.8) 3107.68,2341.8 ; USB1.7@3094.51,2301.63 ccw(c3090.19,2318.58) 3107.68,2318.58 ; USB1.7@3103.9,2285.13 cw(c3120.7,2268.33) 3120.7,2292.09 cw(c3120.7,2315.85) USB1.7@3103.9,2299.05 ; USB1.7@3105.28,2297.32 cw(c3119.83,2306.44) 3107.68,2318.58 ; R14.2 R13.2 3107.68,2318.58 ; USB1.7@3208.09,2285.13 ccw(c3191.29,2268.33) 3191.29,2292.09 ccw(c3191.29,2315.85) USB1.7@3208.09,2299.05 ; USB1.7@3223.84,2285.13 cw(c3207.04,2268.33) 3230.8,2268.33 cw(c3254.56,2268.33) USB1.7@3237.76,2285.13 ; USB1.A12 3230.8,1951.92 3081.2,1951.91 USB1.7@3081.2,2292.08 ; 3333.22,2263.22 ccw(c3267.06,2329.38) D2.1@3360.62,2329.38 ; 3367.5,2295.5 3365.5,2295.5 ; D2.1@3371.96,2337.73 ccw(c3305.01,2404.67) C15.1@3399.68,2404.67 ; 3373.54,2303.54 ccw(c3347.71,2329.38) D2.1@3384.24,2329.38 ; D2.1 3399.68,2352.69 C22.1 3399.68,2599.68 3413.31,2613.31 R16.1 3492.31,2613.31 3557,2678 P1.3@3557,2732 ; C15.1@3377.72,2409.58 ccw(c3324.7,2462.6) 3399.68,2462.6 ; C15.1@3377.99,2398.17 cw(c3334.87,2349.78) D2.1@3399.68,2349.78 ; D2.1@3388.66,2321.03 ccw(c3362.04,2347.64) D2.1@3399.68,2347.64 ; D2.1@3400.37,2332.38 3400.37,2330.37 3365.5,2295.5 ; C1.2@3452.72,2066.58 ccw(c3419.67,2099.63) 3466.41,2099.63 ; 3454.31,1978.31 3454.31,1994 ; 3454.31,2037.09 cw(c3480.24,2037.09) C1.2@3461.91,2055.42 ; C1.2@3454.31,2061 3454.31,1994 ; C1.2@3457.31,2053.52 cw(c3457.31,2016.15) 3483.74,2042.57 ; D4.1 3466.41,2062.1 3465.31,2061 3514,2012.31 v1(3514,1984) ; 3481.74,2044.57 ccw(c3517,2079.83) v1@3517,2029.97 ; 3491.97,2034.34 ccw(c3507.41,2049.78) v1@3516.21,2029.8 ; Q1.2@3499.94,1836.12 ccw(c3534,1854.88) v1(3534,1816) ; P1.3@3547.08,2723.08 cw(c3523.13,2699.13) 3557,2699.13 ; 3557,2679.82 cw(c3618.18,2679.82) P1.3@3574.92,2723.08 ; LED2.2 3704.4,1671.4 3718,1685 3718,1705 ; LED2.4 3716.1,1706.9 3718,1705 ; S1.3 3691.1,1980 v1(3741,1980) ; S1.4 3687.5,2199.5 3741,2146 v1(3741,1980) ; S1.3@3690.29,1986.39 ccw(c3705.7,2001.8) 3705.7,1980 ; 3766.61,1782 cw(c3766.61,1746.91) C2.1@3791.42,1771.72 ; C2.1@3797.98,1769.82 cw(c3797.98,1704.16) 3844.41,1750.59 ; C2.1@3799.06,1769.91 cw(c3806.3,1726.61) 3837.35,1757.65 ; C2.1@3803.25,1780.13 ccw(c3827,1797.33) 3827,1768 ; 3834.81,1760.19 ccw(c3856.54,1781.91) U1.3@3856.54,1751.19 ; U1.3 3844,1751 3827,1768 ; 3964,1851 U1.1 3878,1929 v1(3827,1980) v1(3741,1980) ; U1.9@3988,1763.03 cw(c3988,1731.72) U1.9@4010.14,1753.86 ; U1.9 4013,1751 U1.6 cw(c4098,1850.24) U1.9@4015.74,1794.72 ; U1.9@3995.5,1768.5 ccw(c4009.15,1782.15) U1.9@4021.72,1767.49 ; U1.9@3996.16,1781.51 ccw(c4053.55,1820.24) 4053.55,1751 ; U1.9@4024.39,1767.39 ccw(c4063.97,1806.97) 4063.97,1751 ; USB1.7@3081.19,2292.09 3230.8,2292.09 USB1.B12 3298.31,2228.31 3365.5,2295.5 ; USB1.7@3081.19,2292.09 3107.68,2318.58 ; 3454.31,1994 3446.02,1985.7 3446.02,1837.98 3447.88,1836.12 3486.69,1836.12 3506.81,1816 v1(3534,1816) ; v1(3534,1816) 3693.69,1816 R2.1 3721.69,1782 ; 3718,1705 3721.69,1708.69 3721.69,1782 ; 3721.69,1782 3791.32,1782 C2.1 3805.32,1768 3827,1768
  Top Layer w31.5: 4016,1847 4016,1879 4029.26,1892.26 C11.2@4269.42,1892.26 ; 4239.79,1892.26 cw(c4239.79,1827.09) C11.2@4285.88,1873.17
  Top Layer w39.37: C11.2@4269.42,1892.26 C11.2 ; C11.2@4274,1893 U2.13@4274,2052.68 ; 4274,1904.7 ccw(c4317.4,1904.7) 4286.71,1874.01 ccw(c4306.09,1854.61) 4278.69,1854.61 ; 4278.69,1848.73 ccw(c4358.43,1848.73) C14.1@4302.04,1792.34 ; C11.2@4278.69,1874 4278.69,1811.63 C14.1@4304,1786.32
  Top Layer w47.24: C12.1@4615.32,2548 4689,2548 ; v1@4669,2548 4716.8,2500.2 ; v1@4702.21,2512.64 cw(c4680.38,2485.77) 4715,2485.77 ; v1@4702.96,2511.96 cw(c4673.89,2482.89) 4715,2482.89 ; 4714.37,2502.63 ccw(c4730,2518.27) v1@4730,2496.16 ; R22.1@4715,2401.71 4715,2502 ; 4715,2493.55 cw(c4742.45,2493.55) 4723.04,2512.96 ccw(c4742.45,2493.55) 4715,2493.55
  Bottom Layer w23.62: USB1.7@3074.23,2299.05 ccw(c3057.43,2315.85) 3081.19,2315.85 ccw(c3104.95,2315.85) USB1.7@3088.15,2299.05 ; USB1.7@3081.19,2292.09 3081.19,2367.19 3152,2438 ; USB1.7@3230.81,1951.91 3305.91,1951.91 3321.23,1967.23 ; R15.2@3401.63,2366.4 Q5.2 ; R15.2 3360.32,2361.32 3348,2349 3348,1994 3321.23,1967.23 ; R15.2@3408.58,2356.72 cw(c3431.95,2333.35) 3431.95,2366.4 ; 3430,1828 3321.23,1936.77 3321.23,1967.23 ; v1@4022.02,1764.29 cw(c3997.09,1721.06) R11.2@4047,1721.06 ; v1@4022.2,1767.8 ccw(c4005.18,1806) 4047,1806 4047,1766 ; v1(4023,1766) 4046,1766 ; C4.1@4046.32,1649 R11.2 ; R11.2@4047,1728 4047,1765 ; 4047,1787.92 cw(c4077.41,1787.92) R9.1@4055.91,1809.42
  other v1: 3499,1481 3316,1485 4797,1486 3182,1487 4996,1488 4627,1500 4572,1501 4684,1501 4796,1538 4999,1542 4946,1566 4610,1575 3621,1596 3709,1607 4653,1610 4998,1612 3728,1680 3450,1719 3087,1732 3988,1765 3451,1789 3297,1805 3626,1816 3179,1845 3040,1871 4185,1892.26 4224,1892.26 4105,1896 3304,1899 4556,1902 4662,1926 4872,1959 4829,1961 3643,1975 4828,1999 3517,2028 4829,2032 3043,2359 4674,2482 4730,2506 4698,2508 4671,2547 4709,2548 3183,2760
KEY1: C22.2 R27.1 R28.2 U2.3 | length 863.6
  Top Layer w10: C22.2@3450.9,2471.61 cw(c3428.19,2448.89) 3460.31,2448.89 cw(c3492.44,2448.89) C22.2@3469.72,2471.61 ; R28.2@3451.27,2340.39 ccw(c3429.45,2362.22) 3460.31,2362.22 ; R27.1@3453.28,2383.61 cw(c3436.29,2366.62) 3460.31,2366.62 ; R27.1@3453.28,2404.39 ccw(c3436.29,2421.38) 3460.31,2421.38 ; 3460.31,2355.16 cw(c3500.54,2355.16) R27.1@3472.1,2383.61 ; 3460.31,2364 ccw(c3493.7,2364) R28.2@3470.09,2340.39 ; 3460.31,2432.84 ccw(c3500.54,2432.84) R27.1@3472.1,2404.39 ; R28.2 3460.31,2330.37 3460.31,2414 ; C22.2@3469.72,2472.59 cw(c3492.44,2449.87) 3492.44,2482 cw(c3492.44,2514.13) C22.2@3469.72,2491.41 ; U2.3@3782.12,2483.38 ccw(c3757.05,2458.31) 3757.05,2493.76 ccw(c3757.05,2529.22) U2.3@3782.12,2504.15 ; U2.3 3725.76,2493.76 3714,2482 C22.2 3460.31,2414 ; 3460.31,2414 cw(c3451.62,2414) 3455.99,2406.49 ccw(c3451.62,2414) 3460.31,2414 ; 3460.31,2414 ccw(c3466.38,2414) 3465.22,2408.05 cw(c3466.38,2414) 3460.31,2414
LED_B: R17.2 U2.6 | length 511.2
  Top Layer w10: v1(3713,2329) 3823.41,2329 U2.6 ; v1@3719.21,2322.79 cw(c3734.2,2307.8) 3734.2,2329 cw(c3734.2,2350.2) v1@3719.21,2335.21 ; 3755.63,2329 cw(c3755.63,2291.53) U2.6@3782.12,2318.03 ; 3758.48,2329 ccw(c3758.48,2362.44) U2.6@3782.12,2338.79
  Bottom Layer w10: R17.2@3535.77,2198.94 ccw(c3525.86,2213.31) 3543.32,2213.31 ; R17.2 3543.32,2213.32 ; R17.2@3550.87,2198.94 cw(c3560.77,2213.31) 3543.32,2213.31 ; v1@3706.79,2322.79 ccw(c3691.8,2307.8) 3691.8,2329 ccw(c3691.8,2350.2) v1@3706.79,2335.21 ; v1(3713,2329) 3659,2329 3543.32,2213.32
LED_G: R18.2 U2.7 | length 498.8
  Top Layer w10: v1(3732,2272) 3822.71,2272 U2.7 ; v1@3738.21,2265.79 cw(c3753.2,2250.8) 3753.2,2272 cw(c3753.2,2293.2) v1@3738.21,2278.21 ; 3753.93,2272 ccw(c3753.93,2311.86) U2.7@3782.12,2283.68 ; 3760.17,2272 cw(c3760.17,2240.96) U2.7@3782.12,2262.91
  Bottom Layer w10: R18.2 3568,2116 ; R18.2@3554.43,2108.69 cw(c3568,2099.76) 3568,2116 ; R18.2@3554.43,2123.31 ccw(c3568,2132.24) 3568,2116 ; 3703.36,2251.36 cw(c3732,2222.71) v1@3732,2263.22 ; v1(3732,2272) 3724,2272 3568,2116
MOTOA_FOR: U2.9 U4.3 | length 1439.3
  Top Layer w10: U2.9@3978.12,1989.19 cw(c3939.79,1950.87) v1@3994,1950.87 ; U2.9@3985.19,1996.27 cw(c3963.94,1975.01) 3994,1975.01 ; v1@3987.79,1947.21 ccw(c3972.8,1962.2) 3994,1962.2 ccw(c4015.2,1962.2) v1@4000.21,1947.21 ; U2.9 3994,2046.9 v1(3994,1941) ; 3994,1963.94 cw(c4029.71,1963.94) U2.9@4004.46,1989.19 ; v1(4676,1980) 4733.17,1980 4823.17,2070 4854,2070 ; v1@4682.21,1973.79 cw(c4697.2,1958.8) 4697.2,1980 cw(c4697.2,2001.2) v1@4682.21,1986.21 ; 4832,2070 4854,2070 ; 4928,2114.81 cw(c4954.14,2114.81) U4.3@4935.89,2133.52 ; U4.3@4928,2160 4928,2115 4883,2070 4854,2070
  Bottom Layer w10: v1(3994,1941) 4047,1994 4662,1994 ; v1@3994,1949.78 ccw(c3994,1970.98) 4008.99,1955.99 ccw(c4023.98,1941) v1@4002.78,1941 ; v1@4667.23,1980.43 ccw(c4649.32,1981.32) 4662,1994 ; v1@4675.57,1988.77 cw(c4674.68,2006.68) 4662,1994 ; v1(4676,1980) 4662,1994
MOTOA_REV: U2.8 U4.2 | length 1440.2
  Top Layer w10: U2.8@3911.26,1990.53 cw(c3890.15,1969.42) 3920,1969.42 ; v1@3913.79,1952.21 ccw(c3898.8,1967.2) 3920,1967.2 ccw(c3941.2,1967.2) v1@3926.21,1952.21 ; v1(3920,1946) 3920,2046.51 U2.8 ; v1@3920,1948.05 cw(c3980.07,1948.05) U2.8@3937.59,1990.53 ; 3920,1972.19 cw(c3955.92,1972.19) U2.8@3930.52,1997.6 ; v1@4713,2018 4732,2018 4808,2094 4862,2094 4878,2110 U4.2@4878,2160 ; v1@4719.21,2011.79 cw(c4734.2,1996.8) 4734.2,2018 cw(c4734.2,2039.2) v1@4719.21,2024.21 ; 4878,2114.39 cw(c4905.14,2114.39) U4.2@4885.95,2133.59
  Bottom Layer w10: v1@3920,1954.78 ccw(c3920,1975.98) 3934.99,1960.99 ccw(c3949.98,1946) v1@3928.78,1946 ; v1@3922,1941 3922,1948 3992,2018 v1@4713,2018 ; v1@4706.79,2011.79 ccw(c4691.8,1996.8) 4691.8,2018 ccw(c4691.8,2039.2) v1@4706.79,2024.21
  other v1: 4715,2016
NetBAT1_2: BAT.2 R20.1 R29.2 | length 1204.7
  Top Layer w10: v1(4674,1691) 4809.86,1691 BAT.2 ; v1@4680.21,1684.79 cw(c4695.2,1669.8) 4695.2,1691 cw(c4695.2,1712.2) v1@4680.21,1697.21 ; v1@4685.25,1691 cw(c4685.25,1654.16) BAT.2@4711.3,1680.21 ; v1@4687.21,1691 ccw(c4687.21,1725.07) BAT.2@4711.3,1700.98
  Bottom Layer w10: v1(4674,1691) 4769,1691 4794,1716 4794,2179 4753.31,2219.69 R20.1 4754.32,2296 R29.2 ; v1@4680.21,1684.79 cw(c4695.2,1669.8) 4695.2,1691 cw(c4695.2,1712.2) v1@4680.21,1697.21 ; R20.1@4743.9,2284.61 cw(c4721.19,2261.89) 4753.31,2261.89 cw(c4785.44,2261.89) R20.1@4762.72,2284.61 ; R20.1@4743.9,2305.39 ccw(c4718.77,2330.53) 4754.32,2330.53 ; R29.2@4744.91,2352.61 cw(c4722.19,2329.89) 4754.32,2329.89 cw(c4786.44,2329.89) R29.2@4763.73,2352.61 ; 4754.32,2325.69 ccw(c4783.02,2325.69) R20.1@4762.72,2305.39
NetCN1_1: MOTOR.1 U4.5
NetCN1_2: MOTOR.2 U4.8
NetD4_2: D4.2 R28.1 S1.1 S1.2 | length 592
  Top Layer w10: R28.1@3511.9,2319.61 cw(c3498.18,2305.88) 3517.59,2305.88 ; 3517.59,2287.9 cw(c3562.43,2287.9) R28.1@3530.72,2319.61 ; R28.1@3531.69,2345 3517.59,2330.91 D4.2 3517.69,2259.1 S1.2 S1.1 ; S1.1@3561.8,2003 ccw(c3543.45,2021.35) 3569.4,2021.35 ccw(c3595.35,2021.35) S1.1@3577,2003 ; S1.2@3561.8,2239.7 cw(c3543.45,2221.35) 3569.4,2221.35 cw(c3595.35,2221.35) S1.2@3577,2239.7 ; S1.2@3561.8,2251.5 ccw(c3543.45,2233.15) 3543.45,2259.1 ccw(c3543.45,2285.05) S1.2@3561.8,2266.7
NetLED1_2: LED1.2 LED1.4 R16.2 | length 345.4
  Top Layer w10: R16.2 3453.32,2553 3497,2553 3512,2538 3524,2538 3524.32,2538.32 ; R16.2@3463.39,2543.27 cw(c3486.87,2519.79) 3486.87,2553 ; R16.2@3463.39,2562.09 ccw(c3485.35,2584.05) 3485.35,2553 ; 3549.04,2579 cw(c3549.04,2549.9) LED1.4@3569.61,2570.48 ; 3552.21,2538.32 cw(c3552.21,2513.71) LED1.2@3569.61,2531.11 ; 3557.04,2538.32 ccw(c3557.04,2556.1) LED1.2@3569.61,2543.52 ; 3560.22,2579 ccw(c3560.22,2592.29) LED1.4@3569.61,2582.89 ; LED1.2@3579.76,2538.32 3524.32,2538.32 ; LED1.4@3579.76,2577.68 3578.45,2579 3527,2579 3527,2541 3524.32,2538.32
NetLED2_1: LED2.1 R17.1 | length 830.3
  Top Layer w10: v1(3503,1674) 3505.6,1671.4 LED2.1 ; v1@3509.21,1667.79 cw(c3517.92,1659.08) 3517.92,1671.4 ; v1@3509.21,1680.21 ccw(c3530.47,1701.47) 3530.47,1671.4 ; LED2.1@3581.92,1667.26 ccw(c3571.94,1657.28) 3571.94,1671.4 ccw(c3571.94,1685.52) LED2.1@3581.92,1675.54
  Bottom Layer w10: R17.1@3472.97,2177.91 ccw(c3452,2158.28) 3452,2187 ; R17.1@3472.97,2196.09 cw(c3452,2215.72) 3452,2187 ; R17.1 3452,2187 ; v1@3494.23,1674.43 ccw(c3476.32,1675.32) 3489,1688 ; v1@3502.57,1682.77 cw(c3501.68,1700.68) 3489,1688 ; 3452,2187 3424,2159 3424,2062 3459,2027 3459,1960 3459,1953 3484,1928 3484,1693 v1(3503,1674) 3489,1688
NetLED2_3: LED2.3 R18.1 | length 628.8
  Top Layer w10: v1(3530,1711) 3587.86,1711 LED2.3 ; v1@3536.21,1704.79 cw(c3551.2,1689.8) 3551.2,1711 cw(c3551.2,1732.2) v1@3536.21,1717.21 ; 3562.04,1711 cw(c3562.04,1682.88) LED2.3@3581.92,1702.76
  Bottom Layer w10: R18.1@3473.28,2105.61 cw(c3450.56,2082.89) 3482.69,2082.89 cw(c3514.81,2082.89) R18.1@3492.1,2105.61 ; R18.1 3482.69,1964.6 3505.22,1942.06 3505.22,1735.78 v1(3530,1711) v1@3529,1712 ; v1@3521.22,1711 ccw(c3500.02,1711) 3515.01,1725.99 ccw(c3530,1740.98) v1@3530,1719.78
NetQ1_3: Q1.3 R1.1 | length 230.4
  Top Layer w10: Q1.3@3583.94,1873.52 3626.52,1873.52 3666,1913 R1.1 ; Q1.3@3602.01,1868.7 cw(c3613.63,1857.08) 3613.63,1873.52 cw(c3613.63,1889.96) Q1.3@3602.01,1878.34 ; R1.1@3712.28,1903.59 ccw(c3689.56,1880.87) 3689.56,1913 ccw(c3689.56,1945.13) R1.1@3712.28,1922.41
NetQ3_1: Q3.1 R7.1 R9.2 | length 357.8
  Bottom Layer w15: Q3.1@3901.54,1848.95 cw(c3918.19,1850.47) 3906.37,1862.29 ; Q3.1 3902.94,1858.86 3929,1884.92 ; Q3.1@3916.48,1850.32 cw(c3959.65,1854.27) 3929,1884.92 ; 3962.41,1884.92 ccw(c3962.41,1911.28) R7.1@3981.04,1892.64 ; 3962.78,1884.92 cw(c3962.78,1859.1) R7.1@3981.04,1877.36 ; R7.1@3981.04,1876.37 cw(c3965.01,1860.34) 3987.69,1860.34 ; R9.2@3983.04,1823.63 ccw(c3971.83,1834.84) 3987.69,1834.84 ; 3987.69,1849.31 ccw(c4024.01,1849.31) R9.2@3998.33,1823.63 ; 3987.69,1855.51 cw(c4017.19,1855.51) R7.1@3996.33,1876.37 ; R9.2@3988.68,1803 3987.69,1804 3987.69,1877 3979.76,1884.92 3929,1884.92
NetQ3_3: Q3.3 R8.2 | length 167.7
  Bottom Layer w15: Q3.3 3805.69,1740.99 R8.2 ; 3824.56,1722.13 ccw(c3844.68,1742.26) R8.2@3844.68,1713.79 ; R8.2@3826.93,1719.75 cw(c3810.16,1702.98) R8.2@3833.88,1702.98
NetR1_2: R1.2 R2.2 U1.2 | length 489.9
  Top Layer w10: R2.2@3772.91,1854.39 ccw(c3750.19,1877.11) 3782.32,1877.11 ccw(c3814.44,1877.11) R2.2@3791.73,1854.39 ; R1.2@3772.91,1902.61 cw(c3750.19,1879.89) 3782.32,1879.89 cw(c3814.44,1879.89) R1.2@3791.73,1902.61 ; R2.2@3782.32,1829.71 cw(c3782.32,1747.69) 3840.32,1805.68 ; R2.2@3782.32,1839.71 cw(c3782.32,1781.83) 3823.24,1822.76 ; R2.2@3782.32,1849.71 cw(c3782.32,1815.97) 3806.17,1839.83 ; R1.2 R2.2 3802,1844 ; R2.2@3794.66,1839.04 cw(c3802,1836.1) 3802,1844 ; R2.2@3794.66,1848.96 ccw(c3802,1851.9) 3802,1844 ; 3824.89,1821.11 ccw(c3856.54,1852.75) U1.2@3856.54,1808 ; 3841.96,1804.04 ccw(c3856.54,1818.61) U1.2@3856.54,1798 ; U1.2 3845,1801 3802,1844
NetR21_2: R21.2 R22.2 U4.6 U4.7 U4.9 | length 100.6
  Top Layer w10: R21.2@4749.59,2203.73 ccw(c4726.87,2226.44) 4759,2226.44 ccw(c4791.13,2226.44) R21.2@4768.41,2203.73 ; R21.2 4759,2236 4765,2242
RESET: C12.2 R30.2 U2.18 | length 631
  Top Layer w15: U2.18 4633.58,2438.58 4635,2440 ; U2.18@4488.1,2429.97 cw(c4508.9,2409.17) 4508.9,2438.58 cw(c4508.9,2468) U2.18@4488.1,2447.2 ; 4544.17,2438.58 cw(c4544.17,2336.47) R30.2@4616.37,2408.67 ; 4580.38,2438.58 cw(c4580.38,2372.68) R30.2@4626.98,2419.28 ; C12.2@4614.66,2472.28 cw(c4594.89,2437.38) 4635,2437.38 ; 4616.59,2438.58 cw(c4616.59,2408.89) R30.2@4637.59,2429.89 ; R30.2@4618.34,2423.96 ccw(c4578.13,2464.17) C12.2@4635,2464.17 ; C12.2@4622.05,2485.33 cw(c4609.47,2463.12) 4635,2463.12 ; R30.2@4632,2418.32 4635,2421.32 4635,2440 ; R30.2@4634.27,2423.26 cw(c4643.77,2431.23) 4635,2440 ; C12.2@4635,2489.69 4635,2440 ; 4635,2440 cw(c4621.75,2440) 4624.08,2426.95 ccw(c4621.75,2440) 4635,2440
RX_DEBUG: Q1.1 TP5.1 U2.15 | length 1725.7
  Top Layer w10: Q1.1@3486.69,1910.92 3486.69,1919.69 3502,1935 3593,1935 3610,1952 3610,2012 3674,2076 v1(3674,2106) ; v1@3667.79,2099.79 cw(c3652.8,2084.8) 3674,2084.8 cw(c3695.2,2084.8) v1@3680.21,2099.79 ; v1(4418,2176) 4472,2176 4527,2231 4527,2257 4510.77,2273.23 ; v1@4424.21,2169.79 cw(c4439.2,2154.8) 4439.2,2176 cw(c4439.2,2197.2) v1@4424.21,2182.21 ; U2.15 4510.77,2273.23 ; U2.15@4490.78,2263.84 cw(c4510.77,2247.24) 4510.77,2273.23 ; U2.15@4490.78,2282.61 ccw(c4510.77,2299.22) 4510.77,2273.23
  Bottom Layer w10: v1(3674,2106) 3794,2106 ; v1@3680.21,2099.79 cw(c3695.2,2084.8) 3695.2,2106 cw(c3695.2,2127.2) v1@3680.21,2112.21 ; TP5.1@3781.55,2125.23 cw(c3772.93,2106) 3794,2106 ; TP5.1 3794,2106 ; TP5.1@3806.45,2125.23 ccw(c3815.07,2106) 3794,2106 ; 4376,2106 4291,2106 ; v1@4411.79,2169.79 cw(c4396.8,2154.8) 4418,2154.8 cw(c4439.2,2154.8) v1@4424.21,2169.79 ; v1(4418,2176) 4418,2135 4389,2106 4291,2106 ; 3794,2106 4291,2106
SWS: P1.2 U2.4 | length 780.9
  Top Layer w10: v1(3665,2438.58) U2.4 ; v1@3671.21,2432.37 cw(c3686.2,2417.39) 3686.2,2438.58 cw(c3686.2,2459.78) v1@3671.21,2444.79 ; U2.4@3782.06,2428.2 ccw(c3756.99,2403.13) 3756.99,2438.58 ccw(c3756.99,2474.04) U2.4@3782.06,2448.97
  Bottom Layer w10: P1.2@3442.26,2718.26 cw(c3406.69,2682.69) 3457,2682.69 ; 3457,2674.87 cw(c3509.03,2674.87) P1.2@3477.21,2716.04 ; 3457,2695.25 cw(c3493.28,2695.25) P1.2@3471.09,2723.95 ; P1.2@3457,2732 3457,2675 3665,2467 v1(3665,2438.58) ; v1@3658.79,2444.79 ccw(c3643.8,2459.78) 3665,2459.78 ccw(c3686.2,2459.78) v1@3671.21,2444.79
USB_DEC: Q5.3 R12.2 U2.5 | length 594.2
  Top Layer w7.8: v1@3675,2393 v1@3677,2391
  Top Layer w10: v1(3675,2389) 3680.47,2383.53 U2.5 ; v1@3681.21,2395.21 ccw(c3709.41,2423.41) 3709.41,2383.53 ; U2.5@3782.12,2373.14 ccw(c3757.05,2348.07) 3757.05,2383.53 ccw(c3757.05,2418.98) U2.5@3782.12,2393.91
  Bottom Layer w10: R12.2@3532.38,2420.23 cw(c3532.38,2385.73) 3556.78,2410.12 ; R12.2 3566,2400.9 3566,2388 ; R12.2@3545.69,2433.54 ccw(c3575.44,2433.54) 3554.4,2412.5 ; Q5.3@3561.18,2333.82 ccw(c3549.56,2345.44) 3566,2345.44 ccw(c3582.44,2345.44) Q5.3@3570.82,2333.82 ; Q5.3 3566,2388 ; 3628.32,2389 3643,2389 ; v1@3668.79,2382.79 ccw(c3653.8,2367.8) 3653.8,2389 ccw(c3653.8,2410.2) v1@3668.79,2395.21 ; v1(3675,2389) 3643,2389 ; 3566,2388 3567,2389 3643,2389
VCC_1: BAT.4 C14.2 C20.2 D1.2 Q2.2 U3.2 U4.4 | length 1449
  Top Layer w31.5: D1.2@4197,1716.94 4201.75,1721.69 C14.2@4300,1721.69 ; D1.2@4217.16,1710.14 cw(c4245.04,1682.26) 4245.04,1721.69 ; D1.2@4217.16,1730.46 ccw(c4238.34,1751.64) 4238.34,1721.69 ; 4270.28,1721.69 ccw(c4270.28,1765.42) C14.2@4301.21,1734.5 ; 4283.69,1720 4384,1720 ; C14.2@4306.79,1734.5 ccw(c4328.06,1755.76) 4328.06,1725.69 ; Q2.2 4308.69,1656.31 4300,1665 C14.2@4300,1721.69 ; 4404.31,1725.69 4405,1725 ; C14.2@4300,1721.69 4304,1725.69 C14.2@4300,1721.69
  Top Layer w47.24: 4535.59,1765 4576,1765 4687,1876 4805,1876 ; 4723,1876 4805,1876 ; BAT.4@4920.84,1889.07 ccw(c4860,1949.91) 4946.04,1949.91 ; BAT.4@4939.5,1876 4805,1876 ; BAT.4@4946.04,1875 4946.04,2001 4974,2028.96 ; C20.2@4946.04,2017.32 ccw(c4946.04,2056.7) 4973.89,2028.85 ; C20.2@4946.6,2017.55 ccw(c4858.71,2105.43) 4983,2105.43 ; 4983,2028.96 U4.4@4983,2160
VCC_USB: C1.1 D1.1 D2.2 Q2.1 Q5.1 R3.2 R5.2 R15.1 USB1.A9 USB1.B9 | length 2876.3
  Top Layer w10: D2.2 3417,2236.15 v1(3417,2237) ; D2.2@3380.31,2214.14 ccw(c3380.31,2249.59) 3405.38,2224.52 ; D2.2@3388.93,2195.52 cw(c3419.25,2195.52) D2.2@3397.81,2216.96 ; D2.2@3398.93,2195.52 cw(c3453.39,2195.52) v1@3414.88,2234.03 ; 3401.41,2220.56 ccw(c3384.97,2237) v1@3408.22,2237 ; 3403.47,2222.61 cw(c3417,2209.08) v1@3417,2228.22
  Top Layer w15: D1.1 4250.94,1555.94 ; D1.1@4226.65,1543.14 cw(c4250.93,1526.49) 4250.93,1555.94 ; D1.1@4226.65,1568.73 ccw(c4250.93,1585.39) 4250.93,1555.94 ; 4396.52,1627.52 ccw(c4376.98,1647.06) Q2.1@4404.61,1647.06 ; Q2.1 4408.92,1639.92 4378,1609 4304,1609 4250.94,1555.94
  Top Layer w27.56: USB1.A9 C1.1@3392.95,2062.95 ; USB1.B9 D2.2@3382.9,2181.05 ; 3313.74,2181.05 ccw(c3313.74,2254.21) D2.2@3365.47,2202.48 ; D2.2@3373.35,2188.56 cw(c3324.25,2139.46) 3393.68,2139.46 ; D2.2 3393.68,2178.2 C1.1@3393.68,2061 ; 3393.68,1696.32 3404.91,1685.09 ; C1.1@3393.68,2080.16 ccw(c3414.86,2080.16) C1.1@3399.89,2065.19
  Top Layer w47.24: 3397.68,1696.32 C1.1@3397.68,2061 ; 3404.91,1685.09 3537,1553 ; 3556,1534 3537,1553 ; 4122.83,1524.79 ccw(c4122.83,1638.74) D1.1@4203.4,1558.17 ; D1.1 4176.85,1524.79 R3.2 3565.21,1524.79 3537,1553
  Bottom Layer w10: R15.1@3393.06,2297.21 3398.67,2291.6 R15.1@3417,2291.6 ; R15.1@3394.57,2291.28 cw(c3340.44,2237.14) v1@3417,2237.14 ; R15.1@3401.65,2298.35 cw(c3364.58,2261.28) 3417,2261.28 ; R15.1@3406.32,2303.02 ccw(c3433.91,2330.61) 3433.91,2291.6 ; R15.1@3408.72,2305.42 cw(c3388.72,2285.42) R15.1@3417,2285.42 ; v1@3410.79,2243.21 ccw(c3395.8,2258.2) 3417,2258.2 ccw(c3438.2,2258.2) v1@3423.21,2243.21 ; R15.1@3413.39,2310.1 ccw(c3458.05,2354.75) Q5.1@3458.05,2291.6 ; v1(3417,2237) R15.1@3417,2291.6 ; Q5.1@3454.69,2286.78 ccw(c3443.06,2275.15) 3443.06,2291.6 ccw(c3443.06,2308.04) Q5.1@3454.69,2296.41 ; Q5.1 R15.1@3417,2291.6
VCC_USB1: C2.2 R3.1 U1.4 | length 79.2
  Top Layer w47.24: C2.2 3797,1652.71 R3.1
pads on no net: MOTOR.3 MOTOR.4 U2.21 U4.1

## Polygon pours and split planes (outlines as drawn)
GND on Top Layer "Bottom Layer-No Net" (solid, remove dead copper): 3650.03,2207 3800.73,2207 3799.79,2206 3799.79,2036 3799.79,2019 3800.73,2018 3842.17,2018 3842.17,1898 3845,1895 3831.81,1909 3577.5,1909 3577.5,2085.4 3569.4,2094
GND on Top Layer "Bottom Layer-No Net" (solid, remove dead copper): 3155.96,2792.22 3145.22,2792.22 3015,2662 2998.34,2645.34 2998.34,2359.15 2998.34,2299 3005.25,2292.09 3230.8,2292.09 3230.8,1951.92 3230.81,1951.91 3230.72,1952 2998.34,1952 2998.34,1886.71 2998,1886.37 2998,1709 2998,1611.6 3155.96,1453.64 4675,1453.64 4675,1898 4695,1918 5045.58,1918 5045.58,2421 5036.58,2430 4752,2430 4752,2552 4743,2561 4696,2608 4591,2608 4591,1935 4590,1936 3693,1936 3693,2624 3567,2624 3567,2789.22 3570,2792.22 3155.96,2792.22
NetCN1_1 on Top Layer "Bottom Layer-No Net" (solid, remove dead copper): 4875,2694 4944,2694 4944,2544 5014,2474 5027,2461 5027,2359 5027,2354 5019,2346 4979,2346 4977,2346 4969,2354 4966,2357 4966,2424 4935,2455 4933,2453 4875,2453
GND on Bottom Layer "Bottom Layer-No Net" (solid, remove dead copper): 3155.96,2792.22 3016,2652.26 3016,2586 3016,2546 2998,2528 2998.34,2527.66 2998.34,2359.15 2998.34,1884.75 2999.46,1883.63 3000,1883.09 3000,1687 3000,1609.6 3155.96,1453.64 5045.58,1453.64 5045.58,2792.22 4705,2792.22 4705,2576 4692,2563 4688,2559 3605,2559 3600,2559 3584,2575 3561,2598 3561,2792.22
BAT+ on Bottom Layer "Bottom Layer-No Net" (solid, remove dead copper): 4131,1644 4612,1644 4613,1643 4541,1571 4059,1571 4059,1583 4120,1644

## Keep-outs
Keep-Out Layer:
  circle w1: c4612.51,2122.93 r49.21
  circle w1: c3273.93,2595.37 r49.21
  circle w1: c3273.93,1650.49 r49.21
  lines w1: 2998.34,1886.71 2998.34,2359.15 3155.96,2792.22 5045.58,2792.22 5045.58,1453.64 3155.96,1453.64 2998.34,1886.71

## Other copper
Top Layer:
  rectangle net GND: 3526.76,1914.61 3616.9,1920
  rectangle net GND: 4777,1488 4996,1506
  rectangle net GND: 4874,1489 4920,1570
  rectangle net GND: 4970,1471 5013,1543
  rectangle net GND: 4675,1469.44 4831,1557
  rectangle net GND: 4640,1543 5013,1606
  rectangle net GND: 4656,1578 5015,1639
  rectangle net BAT+: 4674,1741 4998,1796
  rectangle net VCC_1: 4222,1692 4466,1752
  rectangle net GND: 3943,1575 4033,1868
  rectangle net VCC_1: 4399,1711 4549,1796
  rectangle net GND: 4526.17,1871 4619,1916
  rectangle net NetCN1_1: 4875,2453 4944,2694
  rectangle net NetCN1_2: 4780,2345 4844,2693
  rectangle net NetR21_2: 4682,2223 4881,2319
  rectangle net NetR21_2: 4870,2234 4944,2405
  rectangle net VCC_USB1: 3808,1687 3903,1716
  rectangle net BAT+: 4066,1567 4134,1702

## Silkscreen, mask and mechanical layers (free items; w line width, h text height)
Top Overlay:
  circle w1: c3273.93,2595.37 r98.43
  circle w1: c3273.93,1650.49 r98.43
  circle w1: c3628.26,1689.86 r78.74
  circle w1: c3628.26,1689.86 r127.95
  circle w1: c3628.26,1689.86 r25.59
  circle w1: c3628.26,2556 r25.59
  circle w1: c3628.26,2556 r78.74
  circle w1: c3628.26,2556 r127.95
  circle w1: c4612.51,2122.93 r98.43
  circle w1: c3628.26,2122.93 r59.06
  lines w1: 4435.27,1766.57 ccw(c4470.99,1783.15) 4486.68,1747.04 4595.04,1794.16 ccw(c4579.34,1830.26) 4614.98,1846.98 cw(c5203.06,2122.93) 4560.12,2030.1 ; 4435.27,2479.29 cw(c4470.99,2462.71) 4486.68,2498.82 4595.04,2451.7 cw(c4579.34,2415.6) 4614.98,2398.87 ccw(c5203.06,2122.93) 4560.12,2215.76 ; 4435.28,1766.57 cw(c5203.06,2122.93) 4435.28,2479.29 ; 2966.84,1946.94 2966.84,2298.91 3254.24,2298.91 3254.24,1946.94 2966.84,1946.94 ; 3825.11,2063.87 3825.11,2851.28 4455.03,2851.28 4455.03,2063.87 3825.11,2063.87
  text "GND" at 3633,2720 h30
  text "3v3" at 3213,2719 h30
  text "SYS" at 3433,2655 h20
  text "B+" at 4705,1833 h30 r90
  text "B-" at 4697,1525 h30 r90